# Altium PCB power_pcb.PcbDoc
Units mil, origin at the board's own origin, x right, y up, seen from the top; angles counter-clockwise.
Board outline 3025 x 1900 mil, 4 copper layers (Component Side, Ground Plane, Power Plane, Solder Side), stack 33.234 mil thick; 84 components, 43 nets, 285 pads, 61 vias.
Unrouted connection lines stored in the file: 14.
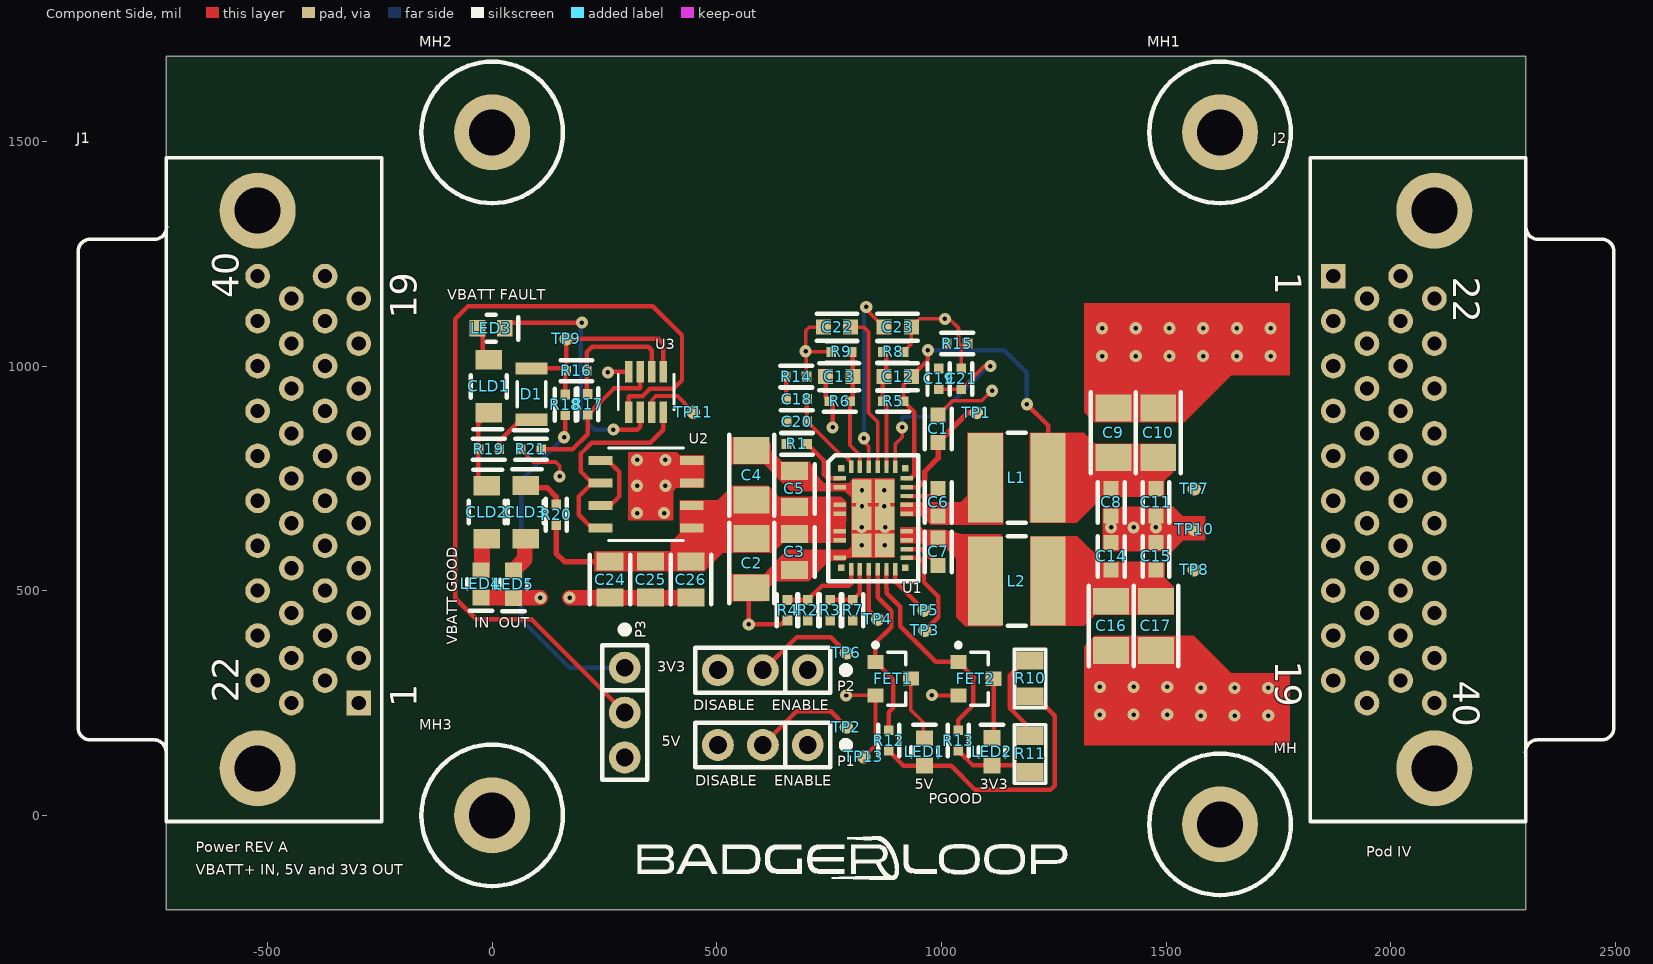
[diagram p0: Component Side view]
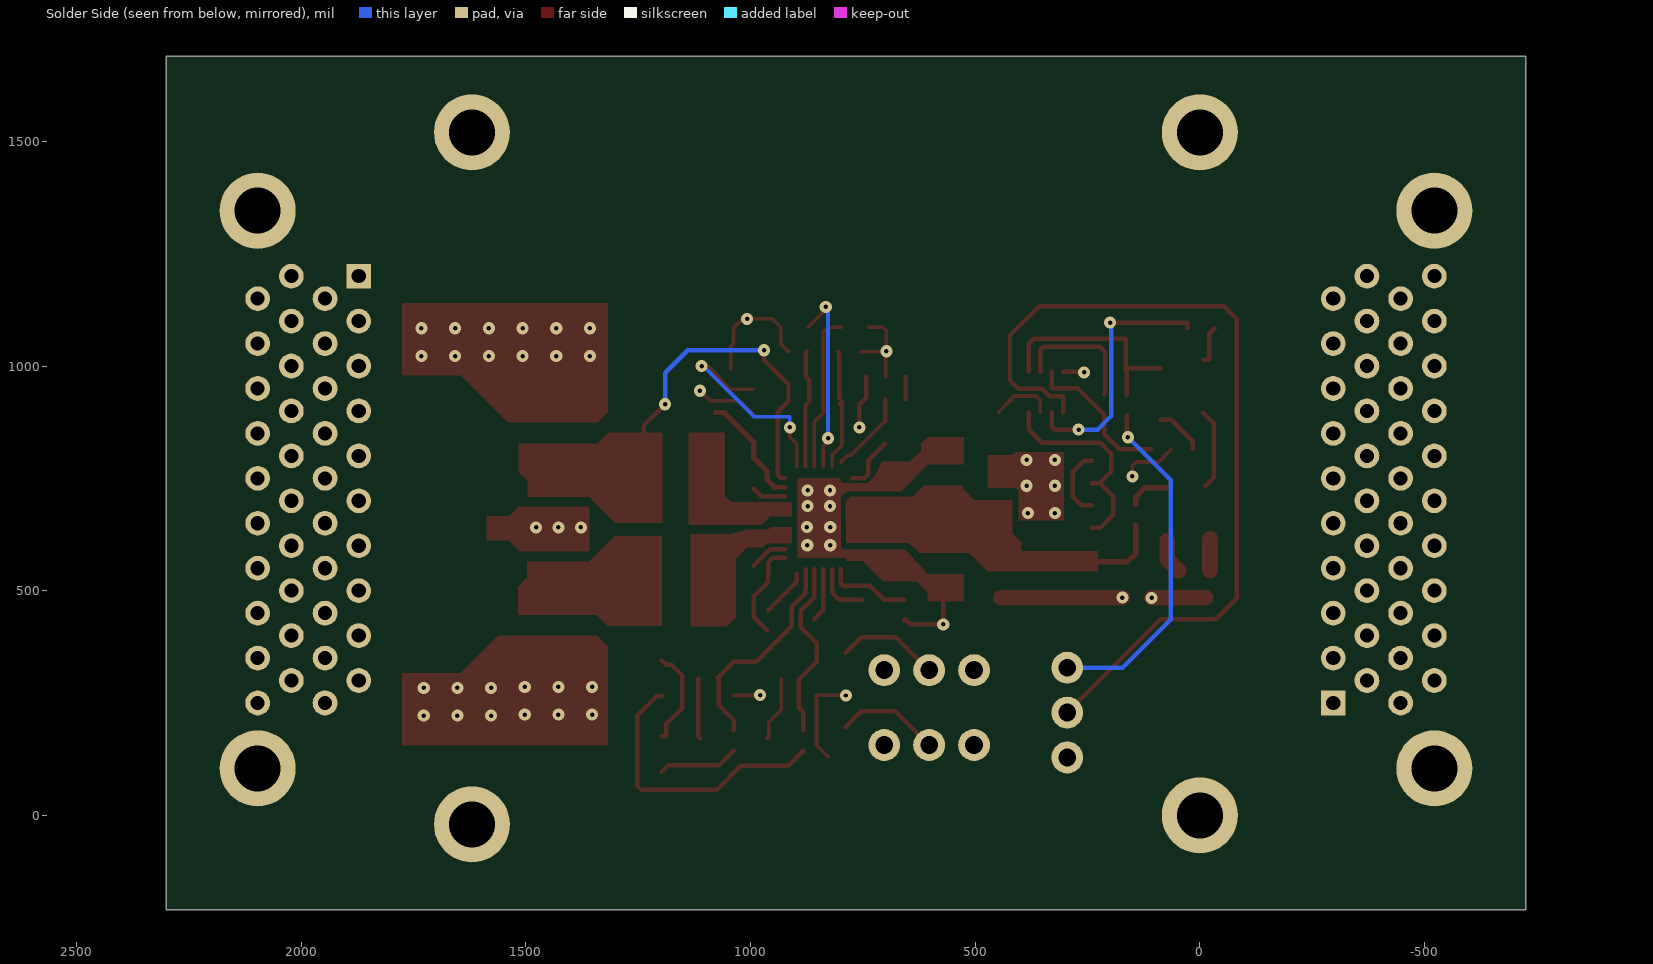
[diagram p1: Solder Side view, seen from below]
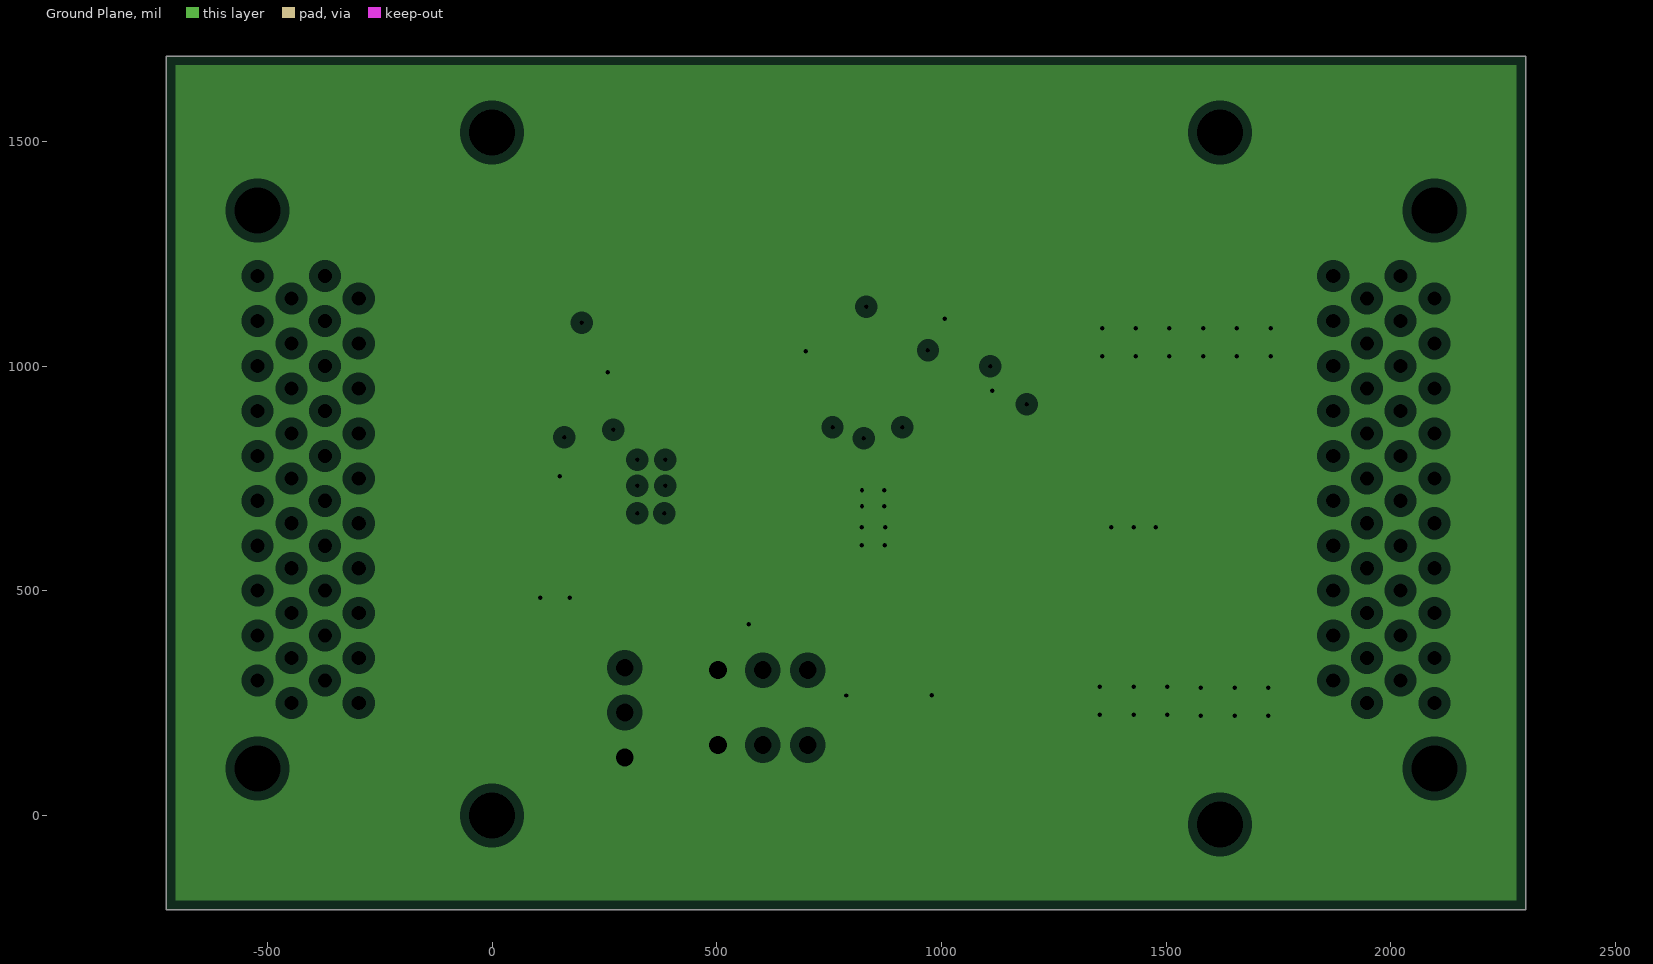
[diagram p2: Ground Plane, clearances drawn from the general rule]
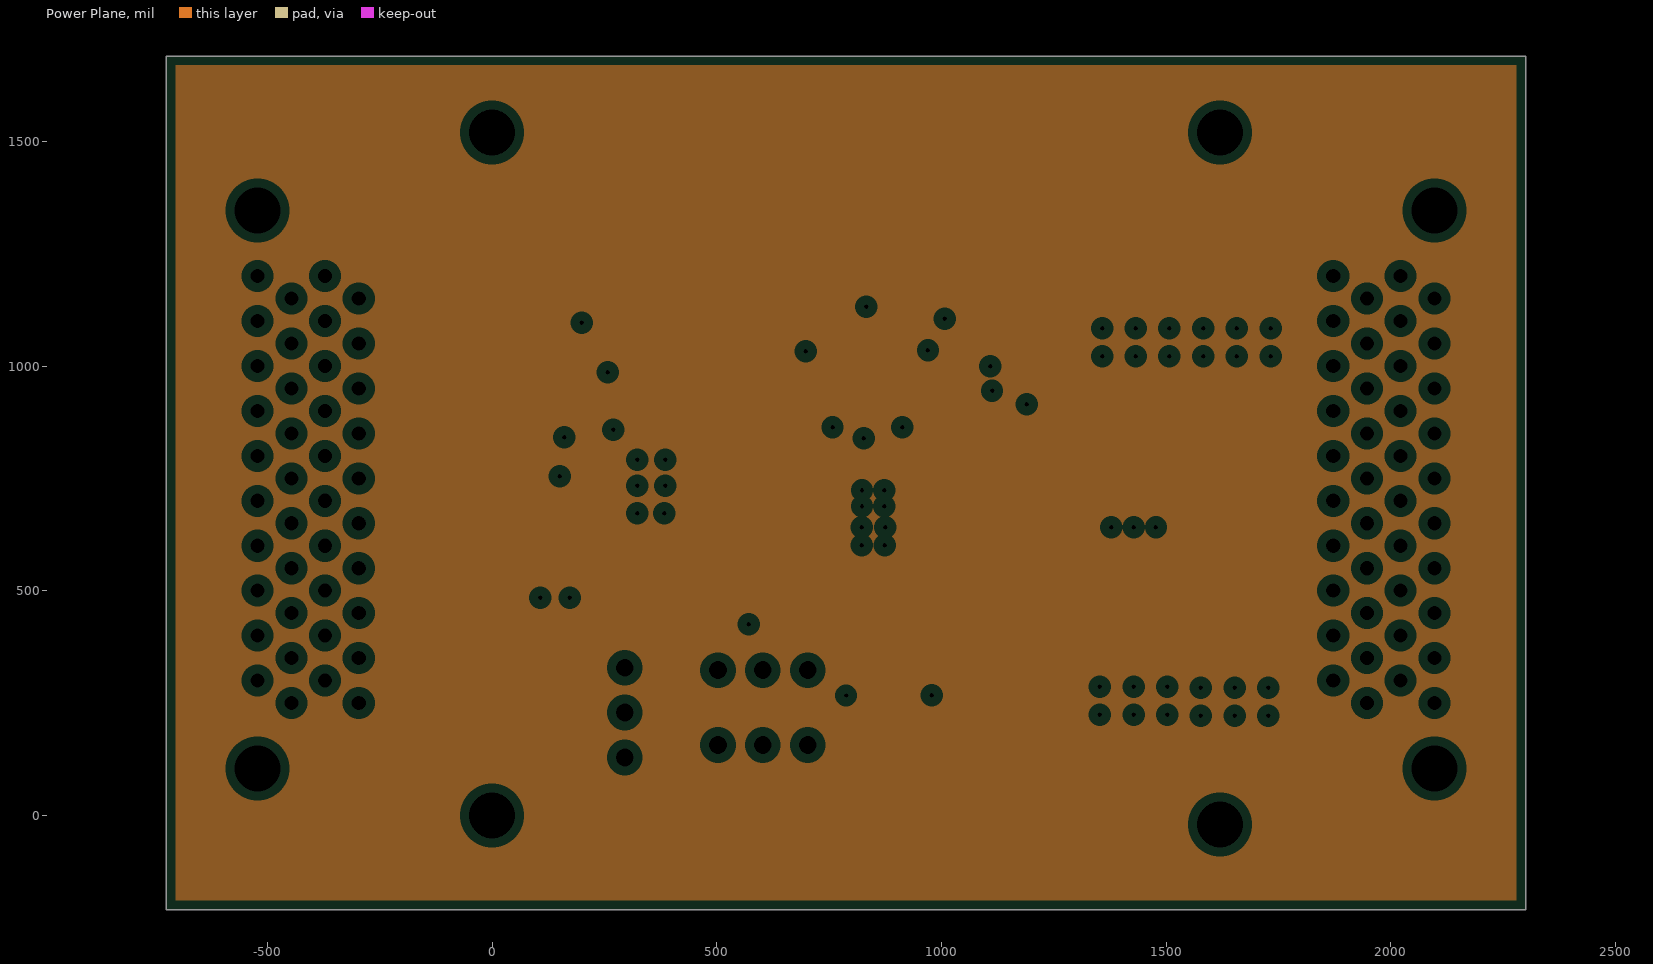
[diagram p3: Power Plane, clearances drawn from the general rule]
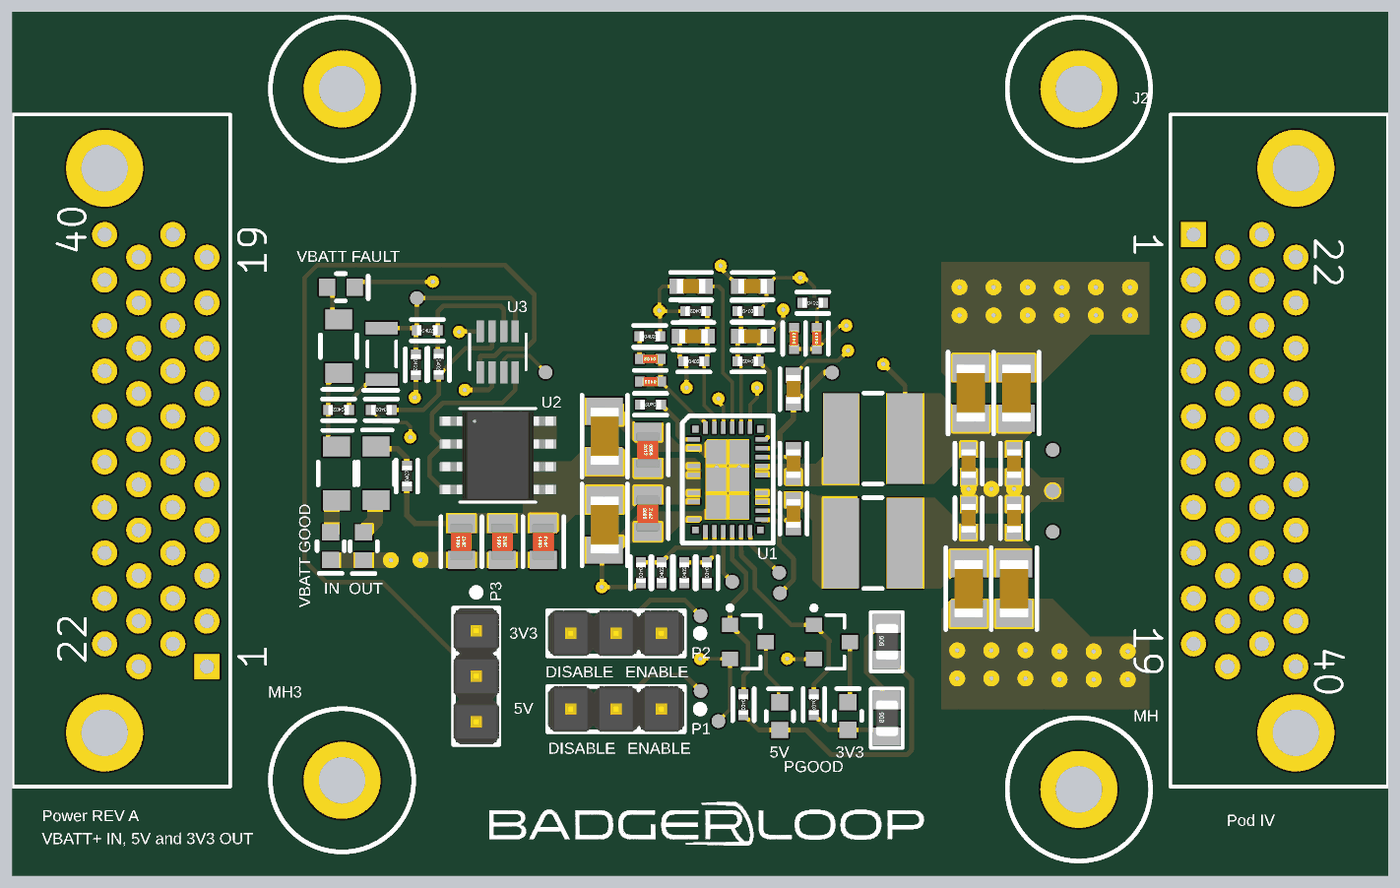
[diagram p4: 3D render of the assembled board from above, using the file's embedded part models]

## Layer stack, top to bottom
Top Solder: solder mask 0.4, Solder Resist, Dk 3.5
Component Side: signal copper 1.4
Dielectric 1: core 12.6, FR-4, Dk 4.8
Ground Plane: plane copper 1.417, net GND
Dielectric 3: prepreg 5, Dk 4.2
Power Plane: plane copper 1.417
Dielectric 4: core 10, Dk 4.2
Solder Side: signal copper 1.4
Bottom Solder: solder mask 0.4, Solder Resist, Dk 3.5

## Board outline
-725,-210 2300,-210 2300,1690 -725,1690

## Design rules (kind name [scope] priority, off if disabled: settings)
Clearance [All] p1: gap=7 ignorepadtopadclearanceinfootprint=TRUE except(0: Arc-Hole Track-Hole SMDPad-Hole THPad-Hole Via-Hole Fill-Hole Poly-Hole Region-Hole Text-Hole; 2: Text-Text)
PlaneClearance [All] p1: clearance=20
PlaneConnect [All] p1: planeconnectstyle=Relief reliefexpansion=20 reliefentries=4 reliefconductorwidth=10 reliefairgap=10
PolygonConnect [All] p1: connectstyle=Relief reliefconductorwidth=10 reliefentries=4 polygonreliefangle="90 Angle" airgapwidth=10
RoutingVias [All] p1: holewidth=28 width=50 viastyle="Through Hole" minholewidth=28 minwidth=50 maxholewidth=28 maxwidth=50
SolderMaskExpansion [All] p1: expansion=4
Width [All] p1: maxlimit=200 minlimit=7 preferedwidth=8 minimp=50.000000 maximp=50.000000 favimp=50.000000
28 further rules are at their usual default settings.

## Classes and differential pairs
component class power_main_connector: J1 J2 MH MH1 MH2 MH3
component class power_PROTECTION: C24 C25 C26 CLD1 CLD2 CLD3 D1 LED3 LED4 LED5 P3 R16 R17 R18 R19 R20 R21 TP9 TP10 TP11 TP13 U2 U3
component class power_PWR: C2 C3 C4 C5 C6 C7 C8 C9 C10 C11 C12 C13 C14 C15 C16 C17 C18 C19 C20 C21 C22 C23 FET1 FET2 L1 L2 LED1 LED2 R2 R3 R4 R5 R6 R7 R8 R9 R10 R11 R12 R13 R14 R15 TP7 TP8 U1
component class power_CTL: C1 Disable P1 P2 R1 TP1 TP2 TP3 TP4 TP5 TP6

## Components (designator, comment, footprint, x,y, rotation, side; value= is the part's Value field where it differs from the comment)
C1 "1µF" SMD-0603C 992.48,860 r180 top
C2 "10µF" SMD-1206C 577.48,561.47 r0 top
C3 "1µF" SMD-0805C 672.48,586.47 r0 top
C4 "10µF" SMD-1206C 577.48,756.59 r180 top
C5 "1µF" SMD-0805C 672.48,726.47 r180 top
C6 "0.22µF" SMD-0603C 992.48,696.47 r0 top
C7 "0.22µF" SMD-0603C 992.48,586.47 r180 top
C8 "4.7µF" SMD-0603C 1377.48,696.47 r0 top
C9 "47µF" SMD-1206C 1382.48,851.47 r180 top
C10 "47µF" SMD-1206C 1482.48,851.47 r180 top
C11 "1µF" SMD-0603C 1477.48,696.47 r0 top
C12 "4.7pF" SMD-0603C 902.48,976.47 r270 top
C13 "4.7pF" SMD-0603C 772.48,976.47 r90 top
C14 "1µF" SMD-0603C 1377.48,576.47 r180 top
C15 "4.7µF" SMD-0603C 1477.48,576.47 r180 top
C16 "47µF" SMD-1206C 1377.48,421.47 r0 top
C17 "47µF" SMD-1206C 1477.48,421.47 r0 top
C18 "0.047µF" SMD-0402C 677.48,926.47 r90 top
C19 "0.047µF" SMD-0402C 993.9,971.47 r0 top
C20 "0.047µF" SMD-0402C 678.3,876.47 r90 top
C21 "0.047µF" SMD-0402C 1043.9,971.47 r0 top
C22 "10000pF" SMD-0603C 767.48,1086.47 r270 top
C23 "10000pF" SMD-0603C 902.48,1086.47 r90 top
C24 "4.7µF" SMD-0805C 262.48,524.59 r0 top
C25 "22uF" SMD-0805C 352.48,524.59 r0 top
C26 "22uF" SMD-0805C 442.48,524.59 r0 top
CLD1 "CMJ2000" SODFL350X80-2N -7.52,954.59 r90 top
CLD2 "CMJ2000" SODFL350X80-2N -12.52,674.59 r270 top
CLD3 "CMJ2000" SODFL350X80-2N 75,675 r270 top
D1 "Diode General Purpose" "Diode General Purpose" 87.48,937.5 r270 top
FET1 "N-MOS" SOT95P240X110-3N 892.45,304.19 r0 top
FET2 "N-MOS" SOT95P240X110-3N 1076.85,304.07 r0 top
J1 "Connector 40" 050DSUB1.27-2H40 -725,725 r90 top
J2 "Connector 40" 050DSUB1.27-2H40 2300,725 r270 top
L1 "IND 1.0uH 5.48x5.28x3.1mm 5mOhm ESR" INDC5649X31N 1167.48,751.47 r0 top value=1.0uH
L2 "IND 1.0uH 5.48x5.28x3.1mm 5mOhm ESR" INDC5649X31N 1167.48,521.47 r180 top value=1.0uH
LED1 "GREEN 0603" "LED 0603 GREEN" 962.48,141.04 r90 top
LED2 "GREEN 0603" "LED 0603 GREEN" 1112.48,141.47 r90 top
LED3 "LED RED 0603" "LED 0603 RED" -2.52,1084.03 r0 top
LED4 "LED GREEN 0603" "LED 0603 GREEN" -25,515 r270 top
LED5 "LED GREEN 0603" "LED 0603 GREEN" 47.48,514.59 r270 top
MH "#10 Mount Hole" MH 1620,-20 r0 top
MH1 "#10 Mount Hole" MH 1620,1520 r0 top
MH2 "#10 Mount Hole" MH 0,1520 r0 top
MH3 "#10 Mount Hole" MH 0,0 r0 top
P1 "Header 3" "Pin Header 1x3 TH Pitch 2.54mm" 702.48,156.47 r180 top
P2 "Header 3" "Pin Header 1x3 TH Pitch 2.54mm" 702.48,323.22 r180 top
P3 "Header 3" "Pin Header 1x3 TH Pitch 2.54mm" 295,328.73 r270 top
R1 "15k" SMD-0402-RES 678.3,826.47 r90 top
R2 "1M" SMD-0402-RES 702.48,456.47 r0 top
R3 "1M" SMD-0402-RES 752.48,456.47 r0 top
R4 "1M" SMD-0402-RES 657.48,456.47 r180 top
R5 "1M" SMD-0402-RES 892.48,921.47 r90 top
R6 "1M" SMD-0402-RES 773.48,921.47 r270 top
R7 "1M" SMD-0402-RES 802.48,456.47 r180 top
R8 "191k" SMD-0402-RES 892.28,1031.47 r270 top
R9 "191k" SMD-0402-RES 777.48,1031.47 r90 top
R10 "25.5" SMD-0805-RES 1197.48,304.56 r0 top
R11 "25.5" SMD-0805-RES 1197.48,136.47 r0 top
R12 "100k" SMD-0402-RES 882.48,166.47 r180 top
R13 "100k" SMD-0402-RES 1037.48,166.47 r180 top
R14 "1M" SMD-0402-RES 676.48,976.47 r270 top
R15 "1M" SMD-0402-RES 1035,1050 r270 top
R16 "1M" SMD-0402-RES 187.48,989.47 r270 top
R17 "56k" SMD-0402-RES 212.48,914.59 r180 top
R18 "510k" SMD-0402-RES 162.48,913.53 r180 top
R19 "0.0" SMD-0402-RES -7.52,814.59 r90 top
R20 "0.0" SMD-0402-RES 142.48,668.97 r0 top
R21 "36k" SMD-0402-RES 86.3,814.59 r90 top
TP1 "TP" "Test Point" 1077.48,896.47 r90 top
TP2 "TP" "Test Point" 788.26,196.47 r90 top
TP3 "TP" "Test Point" 962.87,411.47 r90 top
TP4 "TP" "Test Point" 857.91,436.47 r90 top
TP5 "TP" "Test Point" 961.12,456.47 r90 top
TP6 "TP" "Test Point" 788.26,361.47 r90 top
TP7 "TP" "Test Point" 1562.48,726.47 r90 top
TP8 "TP" "Test Point" 1562.48,546.47 r90 top
TP9 "TP" "Test Point" 164.48,1060.22 r270 top
TP10 "TP" "Test Point" 1562.48,636.47 r0 top
TP11 "TP" "Test Point" 447.48,897.1 r270 top
TP13 "TP" "Test Point" 827.48,130 r270 top
U1 "LT8650SEV#PBF" QFN50P600X400X103-32N240X440 848.07,661.47 r0 top
U2 "SI4214DDY-T1-GE3" SOIC-8_SI-L 342.48,714.59 r0 top value=Value
U3 "LTC4365CTS8#TRMP" TSOT-23_TS8 342.48,942.1 r270 top value=Value

## Footprints (in the part's own frame and the unit in brackets; to place one, negate y for a bottom-side part, rotate by r counter-clockwise, add the part's x,y. Pads: shape width x height; smd on the part's side, far side on the other; paste and mask are expansions set on the pad)
050DSUB1.27-2H40 [mm] "Connector; D Subminiature; 40 Position; Right Angle; Pitch 1.27 mm"
  rect 1.4x1.4 hole 0.8: 1(-12.065,-10.87)
  round 1.4 hole 0.8: 2(-10.795,-8.965) 3(-9.525,-10.87) 4(-8.255,-8.965) 5(-6.985,-10.87) 6(-5.715,-8.965) 7(-4.445,-10.87) 8(-3.175,-8.965) 9(-1.905,-10.87) 10(-0.635,-8.965) 11(0.635,-10.87) 12(1.905,-8.965) 13(3.175,-10.87) 14(4.445,-8.965) 15(5.715,-10.87) 16(6.985,-8.965) 17(8.255,-10.87) 18(9.525,-8.965) 19(10.795,-10.87) 20(12.065,-8.965) 21(-12.065,-7.06) 22(-10.795,-5.155) 23(-9.525,-7.06) 24(-8.255,-5.155) 25(-6.985,-7.06) 26(-5.715,-5.155) 27(-4.445,-7.06) 28(-3.175,-5.155) 29(-1.905,-7.06) 30(-0.635,-5.155) 31(0.635,-7.06) 32(1.905,-5.155) 33(3.175,-7.06) 34(4.445,-5.155) 35(5.715,-7.06) 36(6.985,-5.155) 37(8.255,-7.06) 38(9.525,-5.155) 39(10.795,-7.06) 40(12.065,-5.155)
  round 4.3 hole 2.6: 41(-15.765,-5.155) 42(15.765,-5.155)
  silkscreen extent -18.76,-12.17 18.76,5
"Diode General Purpose" [mm] "Chip Diode, 2-Leads, Body 2.70x1.60mm, IPC Medium Density"
  rect 0.7x1.8 smd: 1(-1.45,0) 2(1.45,0)
  silkscreen extent -0.7,-1.02 2.03,0.89, body extent -1.42,-0.9 1.43,0.9, height 1.35
INDC5649X31N [mm] "Chip Inductor, 2-Leads, Body 5.60x4.90mm, IPC Medium Density"
  rect 1.98x5.04 smd: 1(-1.778,0) 2(1.778,0)
  silkscreen extent -0.51,-2.54 0.51,2.54, body extent -2.38,-2.45 2.54,2.45, height 3.1
"LED 0603 GREEN" [mm] "Chip Diode, 2-Leads, Body 1.60x0.80mm, IPC Medium Density"
  rect 0.9x0.95 smd: 1(-0.775,0) 2(0.775,0)
  silkscreen extent -0.25,-0.76 1.52,0.76, body extent -0.8,-0.4 0.8,0.4, height 0.8
"LED 0603 RED" [mm] "Chip Diode, 2-Leads, Body 1.60x0.80mm, IPC Medium Density"
  rect 0.9x0.95 smd: 1(-0.775,0) 2(0.775,0)
  silkscreen extent -0.25,-0.76 1.52,0.76, body extent -0.8,-0.4 0.8,0.4, height 0.8
MH [mm] "#10 Mount Hole"
  round 4.3 hole 2.6 unplated: 2(0,0)
  silkscreen extent -4,-4 4,4
"Pin Header 1x3 TH Pitch 2.54mm" [mm] "PinHeader 1x3 TH Pitch 2.54mm"
  round 1.8 hole 1: 1(0,0) 2(2.54,0) 3(5.08,0)
  silkscreen extent -2.3,-1.27 6.35,1.27, body extent -1.27,-1.27 6.35,1.27, height 9.5
QFN50P600X400X103-32N240X440 [mm]
  rect 0.7x0.25 smd: 1(-1.9,2.25) 2(-1.9,1.75) 4(-1.9,0.75) 5(-1.9,0.25) 7(-1.9,-0.75) 8(-1.9,-1.25) 10(-1.9,-2.25) 17(1.9,-2.25) 18(1.9,-1.75) 19(1.9,-1.25) 20(1.9,-0.75) 22(1.9,0.25) 23(1.9,0.75) 24(1.9,1.25) 25(1.9,1.75) 26(1.9,2.25)
  rect 0.25x0.7 smd: 11(-1.25,-2.9) 12(-0.75,-2.9) 13(-0.25,-2.9) 14(0.25,-2.9) 15(0.75,-2.9) 16(1.25,-2.9) 27(1.25,2.9) 28(0.75,2.9) 29(0.25,2.9) 30(-0.25,2.9) 31(-0.75,2.9) 32(-1.25,2.9)
  rect 1.1x1.33 smd: 33(-0.65,1.53) 34(0.65,1.53) 35(-0.65,0) 36(0.65,0) 37(-0.65,-1.53) 38(0.65,-1.53)
  rect 0.375x0.375 smd: P1(-1.813,2.812) P2(1.813,2.812) P3(-1.813,-2.812) P4(1.813,-2.812)
  silkscreen extent -2.54,-3.56 2.54,3.56, body extent -2,-3 2,3, height 0.94
SMD-0402-RES [mm]
  rect 0.55x0.55 smd: 1(0,0.584) 2(0,-0.584)
  silkscreen extent -0.6,-0.9 0.6,0.9, body extent -0.28,-0.57 0.27,0.58, height 0.41
SMD-0402C [mm]
  rect 0.55x0.55 smd: 1(0,0.584) 2(0,-0.584)
  silkscreen extent -0.64,-0.89 0.64,0.89, body extent -0.25,-0.51 0.25,0.51, height 0.51
SMD-0603C [mm]
  rect 0.85x0.85 smd: 1(0,0.775) 2(0,-0.775)
  silkscreen extent -0.76,-1.14 0.76,1.14, body extent -0.4,-0.8 0.4,0.8, height 0.9
SMD-0805-RES [mil]
  rect 60x40 smd: 1(0,40) 2(0,-40)
  silkscreen extent -35,-65 35,65, body extent -24,-39 26,39, height 31
SMD-0805C [mil]
  rect 60x40 smd: 1(0,40) 2(0,-40)
  silkscreen extent -45,-55 45,55, body extent -25,-39 25,39, height 35
SMD-1206C [mil]
  rect 80x60 smd: 1(0,55) 2(0,-55)
  silkscreen extent -50,-90 50,90, body extent -31,-63 32,63, height 39
SODFL350X80-2N [mm] "SODFL, 2-Leads, Body 1.60x3.50mm, IPC Medium Density"
  rect 1.1x1.5 smd: 1(-1.5,0) 2(1.5,0)
  silkscreen extent -2.41,-1.02 0.64,1.02, body extent -1.4,-0.85 1.4,0.85, height 0.8
SOIC-8_SI-L [mil]
  rect 53x20 smd paste+0 mask+0: 1(-101.5,75) 2(-101.5,25) 3(-101.5,-25) 4(-101.5,-75) 5(101.5,-75) 6(101.5,-25) 7(101.5,25) 8(101.5,75)
  silkscreen extent -84,-103 84,103, body extent -122,-98 122,98, height 69
SOT95P240X110-3N [mm] "SOT23, 3-Leads, Body 2.90x2.40mm, Pitch 0.95mm, IPC Medium Density"
  rect 0.9x0.8 smd: 1(-1,0.95) 2(1,0) 3(-1,-0.95)
  silkscreen extent -1.12,-1.5 0.7,2.02, body extent -0.7,-1.5 0.7,1.5, height 1.1
"Test Point" [mil] "SMD Test Point"
  round 30 smd: 1(0,0)
TSOT-23_TS8 [mil]
  rect 48x16 smd paste+0 mask+0: 1(-45,38.39) 2(-45,12.8) 3(-45,-12.8) 4(-45,-38.39) 5(45,-38.39) 6(45,-12.8) 7(45,12.8) 8(45,38.39)
  silkscreen extent -40,-62 40,62, body extent -50,-60 45,57, height 24

## Part data
C1 C11 C14: library part GRM188R61H105KAALD, "CAP CER 1UF 50V X5R 0603", Digi-Key Part Number=490-10732-1-ND, Manufacturer="Murata Electronics North America", Operating Temperature="-55°C ~ 85°C", Package / Case="0603 (1608 Metric)", Ratings=-, Temperature Coefficient=X5R, Tolerance=±10%, Voltage=50V, @ qty=0, Applications="General Purpose", Datasheets=http://www.murata.com/~/media/webrenewal/support/library/catalog/products/capacitor/mlcc/c02e.pdf, Factory Stock=0, Features=-, Height - Seated (Max)=-, Image=//media.digikey.com/Renders/Murata%20Renders/ZRB-SERIES-0402.jpg, Lead Spacing=-, Lead Style=-, Minimum Quantity=1, Mounting Type="Surface Mount, MLCC", Packaging="Cut Tape (CT)", Part Number=GRM188R61H105KAALD, Part Status=Active, Quantity Available=46576, Series=GRM, Size / Dimension="0.063\" L x 0.031\" W (1.60mm x 0.80mm)", Thickness (Max)="0.035\" (0.90mm)", Unit Price (USD)=0.17
C2 C4: library part GRM31CR61H106KA12L, "CAP CER 10UF 50V X5R 1206", Digi-Key Part Number=490-5961-1-ND, Manufacturer="Murata Electronics North America", Operating Temperature="-55°C ~ 85°C", Package / Case="1206 (3216 Metric)", Ratings=-, Temperature Coefficient=X5R, Tolerance=±10%, Voltage=50V, @ qty=0, Applications="General Purpose", Datasheets=http://www.murata.com/~/media/webrenewal/support/library/catalog/products/capacitor/mlcc/c02e.pdf, Factory Stock=0, Features=-, Height - Seated (Max)=-, Image=//media.digikey.com/Renders/Murata%20Renders/GR331BD72E473KW01L.jpg, Lead Spacing=-, Lead Style=-, Minimum Quantity=1, Mounting Type="Surface Mount, MLCC", Packaging="Cut Tape (CT)", Part Number=GRM31CR61H106KA12L, Part Status=Active, Quantity Available=86736, Series=GRM, Size / Dimension="0.126\" L x 0.063\" W (3.20mm x 1.60mm)", Thickness (Max)="0.071\" (1.80mm)", Unit Price (USD)=0.65
C3 C5: library part GCJ21BR71H105KA01L, "CAP CER 1UF 50V X7R 0805", Digi-Key Part Number=490-10667-1-ND, Manufacturer="Murata Electronics North America", Operating Temperature="-55°C ~ 125°C", Package / Case="0805 (2012 Metric)", Ratings=AEC-Q200, Temperature Coefficient=X7R, Tolerance=±10%, Voltage=50V, @ qty=0, Applications="Automotive, Boardflex Sensitive", Datasheets=http://www.murata.com/~/media/webrenewal/support/library/catalog/products/capacitor/mlcc/c03e.ashx, Factory Stock=0, Features="Soft Termination", Height - Seated (Max)=-, Image=//media.digikey.com/Renders/Murata%20Renders/0805%20(2012%20Metric)%20.85mm.jpg, Lead Spacing=-, Lead Style=-, Minimum Quantity=1, Mounting Type="Surface Mount, MLCC", Packaging="Cut Tape (CT)", Part Number=GCJ21BR71H105KA01L, Part Status=Active, Quantity Available=55137, Series=GCJ, Size / Dimension="0.079\" L x 0.049\" W (2.00mm x 1.25mm)", Thickness (Max)="0.057\" (1.45mm)", Unit Price (USD)=0.33
C6 C7: library part GCJ188R71E224KA12D, "CAP CER 0.22UF 25V X7R 0603", Digi-Key Part Number=490-5797-1-ND, Manufacturer="Murata Electronics North America", Operating Temperature="-55°C ~ 125°C", Package / Case="0603 (1608 Metric)", Ratings=AEC-Q200, Temperature Coefficient=X7R, Tolerance=±10%, Voltage=25V, @ qty=0, Applications="Automotive, Boardflex Sensitive", Datasheets=http://www.murata.com/~/media/webrenewal/support/library/catalog/products/capacitor/mlcc/c03e.ashx, Factory Stock=0, Features="Soft Termination", Height - Seated (Max)=-, Image=//media.digikey.com/Renders/Murata%20Renders/0603%28LQG18%29.jpg, Lead Spacing=-, Lead Style=-, Minimum Quantity=1, Mounting Type="Surface Mount, MLCC", Packaging="Cut Tape (CT)", Part Number=GCJ188R71E224KA12D, Part Status=Active, Quantity Available=23903, Series=GCJ, Size / Dimension="0.063\" L x 0.031\" W (1.60mm x 0.80mm)", Thickness (Max)="0.035\" (0.90mm)", Unit Price (USD)=0.24
C8 C15: library part GRM188R61E475KE11D, "CAP CER 4.7UF 25V X5R 0603", Digi-Key Part Number=490-7203-1-ND, Manufacturer="Murata Electronics North America", Operating Temperature="-55°C ~ 85°C", Package / Case="0603 (1608 Metric)", Ratings=-, Temperature Coefficient=X5R, Tolerance=±10%, Voltage=25V, @ qty=0, Applications="General Purpose", Datasheets=http://www.murata.com/~/media/webrenewal/support/library/catalog/products/capacitor/mlcc/c02e.pdf, Factory Stock=0, Features=-, Height - Seated (Max)=-, Image=//media.digikey.com/Renders/Murata%20Renders/ZRB-SERIES-0402.jpg, Lead Spacing=-, Lead Style=-, Minimum Quantity=1, Mounting Type="Surface Mount, MLCC", Packaging="Cut Tape (CT)", Part Number=GRM188R61E475KE11D, Part Status=Active, Quantity Available=150881, Series=GRM, Size / Dimension="0.063\" L x 0.031\" W (1.60mm x 0.80mm)", Thickness (Max)="0.031\" (0.80mm)", Unit Price (USD)=0.32
C9 C10 C16 C17: library part GRM31CR61A476ME15L, "CAP CER 47UF 10V X5R 1206", Digi-Key Part Number=490-5528-1-ND, Manufacturer="Murata Electronics North America", Operating Temperature="-55°C ~ 85°C", Package / Case="1206 (3216 Metric)", Ratings=-, Temperature Coefficient=X5R, Tolerance=±20%, Voltage=10V, @ qty=0, Applications="General Purpose", Datasheets=http://www.murata.com/~/media/webrenewal/support/library/catalog/products/capacitor/mlcc/c02e.pdf, Factory Stock=0, Features=-, Height - Seated (Max)=-, Image=//media.digikey.com/Renders/Murata%20Renders/GR331BD72E473KW01L.jpg, Lead Spacing=-, Lead Style=-, Minimum Quantity=1, Mounting Type="Surface Mount, MLCC", Packaging="Cut Tape (CT)", Part Number=GRM31CR61A476ME15L, Part Status=Active, Quantity Available=151940, Series=GRM, Size / Dimension="0.126\" L x 0.063\" W (3.20mm x 1.60mm)", Thickness (Max)="0.071\" (1.80mm)", Unit Price (USD)=0.64
C12 C13: library part GRM1885C1H4R7CA01D, "CAP CER 4.7PF 50V NP0 0603", Digi-Key Part Number=490-12722-1-ND, Manufacturer="Murata Electronics North America", Operating Temperature="-55°C ~ 125°C", Package / Case="0603 (1608 Metric)", Ratings=-, Temperature Coefficient="C0G, NP0", Tolerance=±0.25pF, Voltage=50V, @ qty=0, Applications="General Purpose", Datasheets=http://www.murata.com/~/media/webrenewal/support/library/catalog/products/capacitor/mlcc/c02e.pdf, Factory Stock=0, Features=-, Height - Seated (Max)=-, Image=//media.digikey.com/Renders/Murata%20Renders/ZRB-SERIES-0402.jpg, Lead Spacing=-, Lead Style=-, Minimum Quantity=1, Mounting Type="Surface Mount, MLCC", Packaging="Cut Tape (CT)", Part Number=GRM1885C1H4R7CA01D, Part Status=Active, Quantity Available=25832, Series=GRM, Size / Dimension="0.063\" L x 0.031\" W (1.60mm x 0.80mm)", Thickness (Max)="0.035\" (0.90mm)", Unit Price (USD)=0.1
C18 C19 C20 C21: library part GCM155R71C473KA37D, "CAP CER 0.047UF 16V X7R 0402", Digi-Key Part Number=490-6042-1-ND, Manufacturer="Murata Electronics North America", Operating Temperature="-55°C ~ 125°C", Package / Case="0402 (1005 Metric)", Ratings=AEC-Q200, Temperature Coefficient=X7R, Tolerance=±10%, Voltage=16V, @ qty=0, Applications=Automotive, Datasheets=http://www.murata.com/~/media/webrenewal/support/library/catalog/products/capacitor/mlcc/c03e.ashx, Do Not Populate=DNP, Factory Stock=0, Features=-, Height - Seated (Max)=-, Image=//media.digikey.com/Renders/Murata%20Renders/ZRB-SERIES-0402.jpg, Lead Spacing=-, Lead Style=-, Minimum Quantity=1, Mounting Type="Surface Mount, MLCC", Packaging="Cut Tape (CT)", Part Number=GCM155R71C473KA37D, Part Status=Active, Quantity Available=86052, Series=GCM, Size / Dimension="0.039\" L x 0.020\" W (1.00mm x 0.50mm)", Thickness (Max)="0.022\" (0.55mm)", Unit Price (USD)=0.1
C22 C23: library part GRM188R71E103KA01D, "CAP CER 10000PF 25V X7R 0603", Digi-Key Part Number=490-1520-1-ND, Manufacturer="Murata Electronics North America", Operating Temperature="-55°C ~ 125°C", Package / Case="0603 (1608 Metric)", Ratings=-, Temperature Coefficient=X7R, Tolerance=±10%, Voltage=25V, @ qty=0, Applications="General Purpose", Datasheets=http://www.murata.com/~/media/webrenewal/support/library/catalog/products/capacitor/mlcc/c02e.pdf, Factory Stock=0, Features=-, Height - Seated (Max)=-, Image=//media.digikey.com/Renders/Murata%20Renders/ZRB-SERIES-0402.jpg, Lead Spacing=-, Lead Style=-, Minimum Quantity=1, Mounting Type="Surface Mount, MLCC", Packaging="Cut Tape (CT)", Part Number=GRM188R71E103KA01D, Part Status=Active, Quantity Available=886950, Series=GRM, Size / Dimension="0.063\" L x 0.031\" W (1.60mm x 0.80mm)", Thickness (Max)="0.035\" (0.90mm)", Unit Price (USD)=0.1
C24: library part GRM21BR61H475KE51L, "CAP CER 4.7UF 50V X5R 0805", Digi-Key Part Number=490-10751-1-ND, Manufacturer="Murata Electronics North America", Operating Temperature="-55°C ~ 85°C", Package / Case="0805 (2012 Metric)", Ratings=-, Temperature Coefficient=X5R, Tolerance=±10%, Voltage=50V, @ qty=0, Applications="General Purpose", Datasheets=http://www.murata.com/~/media/webrenewal/support/library/catalog/products/capacitor/mlcc/c02e.pdf, Factory Stock=0, Features=-, Height - Seated (Max)=-, Image=//media.digikey.com/Renders/Murata%20Renders/0805%20(2012%20Metric)%20.85mm.jpg, Lead Spacing=-, Lead Style=-, Minimum Quantity=1, Mounting Type="Surface Mount, MLCC", Packaging="Cut Tape (CT)", Part Number=GRM21BR61H475KE51L, Part Status=Active, Quantity Available=29522, Series=GRM, Size / Dimension="0.079\" L x 0.049\" W (2.00mm x 1.25mm)", Thickness (Max)="0.055\" (1.40mm)", Unit Price (USD)=0.37
C25 C26: library part GC321AD72E103KX01D, "CAP CER 10000PF 250V X7T 0805", Digi-Key Part Number=445-11527-1-ND, Manufacturer="TDK Corporation", Operating Temperature="-55°C ~ 125°C", Package / Case=0805, Part Number=C2012JB1V226M125AC, Ratings=AEC-Q200, Temperature Coefficient=JB, Tolerance=±20%, Voltage=35V, @ qty=0, Applications=Automotive, Factory Stock=10000, Features=-, Height - Seated (Max)=-, Image=//media.digikey.com/Renders/Murata%20Renders/0805(GC3)200x125.jpg, Lead Spacing=-, Lead Style=-, Minimum Quantity=1, Mounting Type="Surface Mount, MLCC", Packaging="Cut Tape (CT)", Part Status=Active, Quantity Available=4000, Series=GC3, Size / Dimension="0.079\" L x 0.049\" W (2.00mm x 1.25mm)", Thickness (Max)="0.039\" (1.00mm)", Unit Price (USD)=0.3
CLD1 CLD2 CLD3: library part "DIODE Current Limiting Single SM", "DIODE CURRENT LIMITING SINGLE SM", Current Output=2mA, Manufacturer="Central Semiconductor Corp", Manufacturer P/N="CMJ2000 TR", Package / Case=SOD-123F, ComponentLink1Description=Digikey, ComponentLink1URL=https://www.digikey.com/product-detail/en/central-semiconductor-corp/CMJ2000-TR/CMJ2000CT-ND/5018676, Digikey P/N=CMJ2000CT-ND, Vin Max=100V
D1: "DIODE GEN PURP 100V 150MA SOD123", Manufacturer="Micro Commercial Co", Manufacturer P/N=1N4148W-TP, Package / Case=SOD123, ComponentLink1Description=Digikey, ComponentLink1URL=https://www.digikey.com/product-detail/en/micro-commercial-co/1N4148W-TP/1N4148WTPMSTR-ND/717196, Digikey P/N=1N4148WTPMSTR-ND
FET1 FET2: library part "N-MOS Enhancement Mode", "MOSFET N-CH 60V 200MA SOT23-3", Manufacturer=Zetex, Manufacturer P/N=ZVN4106FTA, Digikey P/N=ZVN4106FCT-ND
J1 J2: "Plug Assembly, 40-Pin Connector", PackageDocument=E, DatasheetDocument=31-Oct-1991, Gender="Receptacle Header", LatestRevisionDate=17-Jul-2002, LatestRevisionNote="Re-released for DXP Platform.", Orientation="Right Angle", PackageReference=174213-2, Positions=40, Published=15-Jun-2001, Publisher="Altium Limited"
L1 L2: "XFL5030-102ME", Inductance=1uH, Maximum DC Current=28A, Package / Case="5.48mm x 5.28mm x 3.1mm", Temperature="-40C ~ 125C", Tolerance=+-20%, Datasheet=https://www.mouser.com/datasheet/2/597/xfl5030-1223909.pdf, Height=3.1mm, Link=https://www.mouser.com/ProductDetail/Coilcraft/XFL5030-102MEB?qs=sGAEpiMZZMsg%252by3WlYCkUy0Se8nYOmwuY%252bO5URw9yeY%3d, Manufacturer_Part_Number=XFL5030-102ME, Qualification=AEC-Q200, RefDes=RefDes, Type=DEV, Vendor=CoilCraft
LED1 LED2: library part "LED GREEN 0603", Color=GREEN, Manufacturer="Lite-On Inc.", Manufacturer P/N=LTST-C190KGKT, Package / Case=0603, Digikey P/N=160-1435-1-ND
LED3: "Red 631nm LED Indication - Discrete 2V 0603 (1608 Metric)", Color=RED, Manufacturer="Lite-On Inc.", Manufacturer P/N=LTST-C190KRKT, Package / Case=0603, Digikey P/N=160-1436-1-ND
LED4 LED5: Color=GREEN, Manufacturer="Lite-On Inc.", Manufacturer P/N=LTST-C190KGKT, Package / Case=0603, Digikey P/N=160-1435-1-ND
P1 P2 P3: "Header, 3-Pin", LatestRevisionDate=17-Jul-2002, LatestRevisionNote="Re-released for DXP Platform.", Publisher="Altium Limited"
R1: library part ERJ-2GEJ153X, "RES SMD 15K OHM 5% 1/10W 0402", Digi-Key Part Number=P15KJCT-ND, Manufacturer="Panasonic Electronic Components", Operating Temperature="-55°C ~ 155°C", Package / Case="0402 (1005 Metric)", Power (Watts)="0.1W, 1/10W", Supplier Device Package=0402, Temperature Coefficient=±200ppm/°C, Tolerance=±5%, @ qty=1500, Composition="Thick Film", Datasheets=http://industrial.panasonic.com/www-cgi/jvcr13pz.cgi?E+PZ+3+AOA0001+ERJ2GEJ153X+7+WW, Factory Stock=0, Failure Rate=-, Features="Automotive AEC-Q200", Height - Seated (Max)="0.016\" (0.40mm)", Image=//media.digikey.com/Photos/Panasonic%20Photos/ERJ-PA2-Series.jpg, Minimum Quantity=1, Number of Terminations=2, Packaging="Cut Tape (CT)", Part Number=ERJ-2GEJ153X, Part Status=Active, Quantity Available=331812, Series=ERJ, Size / Dimension="0.039\" L x 0.020\" W (1.00mm x 0.50mm)", Unit Price (USD)=0.00350
R2 R3 R4 R5 R6 R7 R14 R15: library part ERJ-2RKF1004X, "RES SMD 1M OHM 1% 1/10W 0402", Digi-Key Part Number=P1.00MLCT-ND, Manufacturer="Panasonic Electronic Components", Operating Temperature="-55°C ~ 155°C", Package / Case="0402 (1005 Metric)", Power (Watts)="0.1W, 1/10W", Supplier Device Package=0402, Temperature Coefficient=±100ppm/°C, Tolerance=±1%, @ qty=1500, Composition="Thick Film", Datasheets=http://industrial.panasonic.com/www-cgi/jvcr13pz.cgi?E+PZ+3+AOA0002+ERJ2RKF1004X+7+WW, Factory Stock=0, Failure Rate=-, Features="Automotive AEC-Q200", Height - Seated (Max)="0.016\" (0.40mm)", Image=//media.digikey.com/Photos/Panasonic%20Photos/ERJ-PA2-Series.jpg, Minimum Quantity=1, Number of Terminations=2, Packaging="Cut Tape (CT)", Part Number=ERJ-2RKF1004X, Part Status=Active, Quantity Available=773705, Series=ERJ, Size / Dimension="0.039\" L x 0.020\" W (1.00mm x 0.50mm)", Unit Price (USD)=0.00496
  R4 R7 R14 R15: Do Not Populate=DNP
R8 R9: library part ERJ-2RKF1913X, "RES SMD 191K OHM 1% 1/10W 0402", Digi-Key Part Number=P191KLCT-ND, Manufacturer="Panasonic Electronic Components", Operating Temperature="-55°C ~ 155°C", Package / Case="0402 (1005 Metric)", Power (Watts)="0.1W, 1/10W", Supplier Device Package=0402, Temperature Coefficient=±100ppm/°C, Tolerance=±1%, @ qty=1500, Composition="Thick Film", Datasheets=http://industrial.panasonic.com/www-cgi/jvcr13pz.cgi?E+PZ+3+AOA0002+ERJ2RKF1913X+7+WW, Factory Stock=0, Failure Rate=-, Features="Automotive AEC-Q200", Height - Seated (Max)="0.016\" (0.40mm)", Image=//media.digikey.com/Photos/Panasonic%20Photos/ERJ-PA2-Series.jpg, Minimum Quantity=1, Number of Terminations=2, Packaging="Cut Tape (CT)", Part Number=ERJ-2RKF1913X, Part Status=Active, Quantity Available=44522, Series=ERJ, Size / Dimension="0.039\" L x 0.020\" W (1.00mm x 0.50mm)", Unit Price (USD)=0.00496
R10 R11: library part ERJ-6ENF25R5V, "RES SMD 25.5 OHM 1% 1/8W 0805", Digi-Key Part Number=P25.5CCT-ND, Manufacturer="Panasonic Electronic Components", Operating Temperature="-55°C ~ 155°C", Package / Case="0805 (2012 Metric)", Power (Watts)="0.125W, 1/8W", Supplier Device Package=0805, Temperature Coefficient=±100ppm/°C, Tolerance=±1%, @ qty=1500, Composition="Thick Film", Datasheets=http://industrial.panasonic.com/www-cgi/jvcr13pz.cgi?E+PZ+3+AOA0002+ERJ6ENF25R5V+7+WW, Factory Stock=0, Failure Rate=-, Features="Automotive AEC-Q200", Height - Seated (Max)="0.028\" (0.70mm)", Image=//media.digikey.com/Renders/Panasonic%20Renders/ERJ-0805%20Pkg.jpg, Minimum Quantity=1, Number of Terminations=2, Packaging="Cut Tape (CT)", Part Number=ERJ-6ENF25R5V, Part Status=Active, Quantity Available=41783, Series=ERJ, Size / Dimension="0.079\" L x 0.049\" W (2.00mm x 1.25mm)", Unit Price (USD)=0.00729
R12 R13: library part ERJ-2GEJ104X, "RES SMD 100K OHM 5% 1/10W 0402", Digi-Key Part Number=P100KJCT-ND, Manufacturer="Panasonic Electronic Components", Operating Temperature="-55°C ~ 155°C", Package / Case="0402 (1005 Metric)", Power (Watts)="0.1W, 1/10W", Supplier Device Package=0402, Temperature Coefficient=±200ppm/°C, Tolerance=±5%, @ qty=1500, Composition="Thick Film", Datasheets=http://industrial.panasonic.com/www-cgi/jvcr13pz.cgi?E+PZ+3+AOA0001+ERJ2GEJ104X+7+WW, Factory Stock=0, Failure Rate=-, Features="Automotive AEC-Q200", Height - Seated (Max)="0.016\" (0.40mm)", Image=//media.digikey.com/Photos/Panasonic%20Photos/ERJ-PA2-Series.jpg, Minimum Quantity=1, Number of Terminations=2, Packaging="Cut Tape (CT)", Part Number=ERJ-2GEJ104X, Part Status=Active, Quantity Available=2387986, Series=ERJ, Size / Dimension="0.039\" L x 0.020\" W (1.00mm x 0.50mm)", Unit Price (USD)=0.00350
R16: library part ERJ-2GEJ105X, "RES SMD 1M OHM 5% 1/10W 0402", Digi-Key Part Number=P1.0MJCT-ND, Manufacturer="Panasonic Electronic Components", Operating Temperature="-55°C ~ 155°C", Package / Case="0402 (1005 Metric)", Power (Watts)="0.1W, 1/10W", Supplier Device Package=0402, Temperature Coefficient=±200ppm/°C, Tolerance=±5%, @ qty=1500, Composition="Thick Film", Datasheets=http://industrial.panasonic.com/www-cgi/jvcr13pz.cgi?E+PZ+3+AOA0001+ERJ2GEJ105X+7+WW, Factory Stock=0, Failure Rate=-, Features="Automotive AEC-Q200", Height - Seated (Max)="0.016\" (0.40mm)", Image=//media.digikey.com/Photos/Panasonic%20Photos/ERJ-PA2-Series.jpg, Minimum Quantity=1, Number of Terminations=2, Packaging="Cut Tape (CT)", Part Number=ERJ-2GEJ105X, Part Status=Active, Quantity Available=1082572, Series=ERJ, Size / Dimension="0.039\" L x 0.020\" W (1.00mm x 0.50mm)", Unit Price (USD)=0.00350
R17: library part ERJ-2GEJ563X, "RES SMD 56K OHM 5% 1/10W 0402", Digi-Key Part Number=P56KJCT-ND, Manufacturer="Panasonic Electronic Components", Operating Temperature="-55°C ~ 155°C", Package / Case="0402 (1005 Metric)", Power (Watts)="0.1W, 1/10W", Supplier Device Package=0402, Temperature Coefficient=±200ppm/°C, Tolerance=±5%, @ qty=1500, Composition="Thick Film", Datasheets=http://industrial.panasonic.com/www-cgi/jvcr13pz.cgi?E+PZ+3+AOA0001+ERJ2GEJ563X+7+WW, Factory Stock=0, Failure Rate=-, Features="Automotive AEC-Q200", Height - Seated (Max)="0.016\" (0.40mm)", Image=//media.digikey.com/Photos/Panasonic%20Photos/ERJ-PA2-Series.jpg, Minimum Quantity=1, Number of Terminations=2, Packaging="Cut Tape (CT)", Part Number=ERJ-2GEJ563X, Part Status=Active, Quantity Available=208344, Series=ERJ, Size / Dimension="0.039\" L x 0.020\" W (1.00mm x 0.50mm)", Unit Price (USD)=0.00350
R18: library part ERJ-2GEJ514X, "RES SMD 510K OHM 5% 1/10W 0402", Digi-Key Part Number=P510KJCT-ND, Manufacturer="Panasonic Electronic Components", Operating Temperature="-55°C ~ 155°C", Package / Case="0402 (1005 Metric)", Power (Watts)="0.1W, 1/10W", Supplier Device Package=0402, Temperature Coefficient=±200ppm/°C, Tolerance=±5%, @ qty=1500, Composition="Thick Film", Datasheets=http://industrial.panasonic.com/www-cgi/jvcr13pz.cgi?E+PZ+3+AOA0001+ERJ2GEJ514X+7+WW, Factory Stock=0, Failure Rate=-, Features="Automotive AEC-Q200", Height - Seated (Max)="0.016\" (0.40mm)", Image=//media.digikey.com/Photos/Panasonic%20Photos/ERJ-PA2-Series.jpg, Minimum Quantity=1, Number of Terminations=2, Packaging="Cut Tape (CT)", Part Number=ERJ-2GEJ514X, Part Status=Active, Quantity Available=151230, Series=ERJ, Size / Dimension="0.039\" L x 0.020\" W (1.00mm x 0.50mm)", Unit Price (USD)=0.00350
R19 R20: library part ERJ-2GE0R00X, "RES SMD 0.0OHM JUMPER 1/10W 0402", Digi-Key Part Number=P0.0JCT-ND, Manufacturer="Panasonic Electronic Components", Operating Temperature="-55°C ~ 155°C", Package / Case="0402 (1005 Metric)", Power (Watts)="0.1W, 1/10W", Supplier Device Package=0402, Temperature Coefficient=-, Tolerance=Jumper, @ qty=1500, Composition="Thick Film", Datasheets=http://industrial.panasonic.com/www-cgi/jvcr13pz.cgi?E+PZ+3+AOA0001+ERJ2GE0R00X+7+WW, Factory Stock=0, Failure Rate=-, Features="Automotive AEC-Q200", Height - Seated (Max)="0.016\" (0.40mm)", Image=//media.digikey.com/Photos/Panasonic%20Photos/ERJ-PA2-Series.jpg, Minimum Quantity=1, Number of Terminations=2, Packaging="Cut Tape (CT)", Part Number=ERJ-2GE0R00X, Part Status=Active, Quantity Available=3152483, Series=ERJ, Size / Dimension="0.039\" L x 0.020\" W (1.00mm x 0.50mm)", Unit Price (USD)=0.00384
R21: library part ERJ-2RKF3602X, "RES SMD 36K OHM 1% 1/10W 0402", Digi-Key Part Number=P36.0KLCT-ND, Manufacturer="Panasonic Electronic Components", Operating Temperature="-55°C ~ 155°C", Package / Case="0402 (1005 Metric)", Power (Watts)="0.1W, 1/10W", Supplier Device Package=0402, Temperature Coefficient=±100ppm/°C, Tolerance=±1%, @ qty=1500, Composition="Thick Film", Datasheets=http://industrial.panasonic.com/www-cgi/jvcr13pz.cgi?E+PZ+3+AOA0002+ERJ2RKF3602X+7+WW, Factory Stock=0, Failure Rate=-, Features="Automotive AEC-Q200", Height - Seated (Max)="0.016\" (0.40mm)", Image=//media.digikey.com/Photos/Panasonic%20Photos/ERJ-PA2-Series.jpg, Minimum Quantity=1, Number of Terminations=2, Packaging="Cut Tape (CT)", Part Number=ERJ-2RKF3602X, Part Status=Active, Quantity Available=208341, Series=ERJ, Size / Dimension="0.039\" L x 0.020\" W (1.00mm x 0.50mm)", Unit Price (USD)=0.00496
U1: "LT8650S - Dual Channel 4A, 42V, Synchronous Step-Down Silent Switcher 2 with 6.2µA Quiescent Current", Package="LQFN-32 Linear Technology", Digi-Key_Part_Number=LT8650SEV#PBF-ND, Digi-Key_Purchase_URL=https://www.digikey.com/product-detail/en/linear-technology-analog-devices/LT8650SEV-PBF/LT8650SEV-PBF-ND/7702365?utm_source=snapeda&utm_medium=aggregator&utm_campaign=symbol, MF="Linear Technology", MP=LT8650SEV#PBF, SnapEDA_Link=https://www.snapeda.com/parts/LT8650SEV%23PBF/Linear%20Technology/Analog%20Devices/view-part/?ref=snap
U2: "Mosfet Array 2 N-Channel (Dual) 30V 8.5A 3.1W Surface Mount 8-SO", ComponentLink1Description=Digikey, ComponentLink1URL=https://www.digikey.com/product-detail/en/vishay-siliconix/SI4214DDY-T1-GE3/SI4214DDY-T1-GE3CT-ND/3305376, ComponentLink2Description=Datasheet, ComponentLink2URL=http://www.vishay.com/docs/67907/si4214ddy-t1-e3.pdf, Digikey P/N=SI4214DDY-T1-GE3CT-ND, I_D (A)=8.5, Manufacturer_Part_Number=SI4214DDY-T1-GE3, Rds(on)=0.0195, RefDes=U, Type=DEV, V_DS=30V, Vendor=Vishay
U3: "Overvoltage, / Undervoltage and Reverse / Supply Protection Controller", Manufacturer_Part_Number=LTC4365CTS8#TRMPBF, Supplier Part Number 1=LTC4365CTS8#TRMPBFDKR-ND, RefDes=RefDes, Supplier 1=Digi-Key, Type=DEV, Vendor="Linear Technology"

## Via types
v1: diameter 27, hole 10, Component Side to Solder Side, 61 vias

## Nets (pads, with @x,y where several pads share a name; then routed paths per layer and width w, separated by ;. In a path a pad name is that pad's centre, name@x,y a point inside that pad or via, vN(x,y) a via of type N, cw(c..) or ccw(c..) an arc to the next point about the centre after c; other vN are vias at no path point)
3V3_EN_N: P2.2 R3.1 R7.2 TP6.1 U1.12 | length 355.8
  Component Side w10: P2.2@602.48,321.47 677.48,396.47 753.26,396.47 TP6.1 ; R3.1 R7.2 818.54,495.53 U1.12
5V_EN_N: P1.2 R2.1 R4.2 TP2.1 U1.11 | length 419.6
  Component Side w10: P1.2 677.48,231.47 753.26,231.47 TP2.1 ; R4.2 R2.1 734.48,511.47 795.1,511.47 798.85,515.22 U1.11
GND: C1.2 C2.2 C3.2 C4.2 C5.2 C8.2 C9.2 C10.2 C11.2 C14.2 C15.2 C16.2 C17.2 C20.1 C21.1 C22.2 C23.2 C24.2 C25.2 C26.2 FET1.3 FET2.3 LED4.2 LED5.2 P1.3 P2.3 P3.3 R1.1 R4.1 R7.1 R8.1 R9.1 R14.1 R15.1 R21.1 TP10.1 TP13.1 U1.2 U1.10 U1.33 U1.34 U1.35 U1.36 U1.37 U1.38 U3.4 | length 1601.8
  Component Side w8: R21.1 91.42,786.47 141.75,786.47 150,778.22 v1@150,757.85 ; R14.1 699.48,1030.77 v1@698.78,1031.47 ; C22.2 705.48,1086.47 697.48,1078.47 v1(697.48,1032.77) v1@698.78,1031.47 ; R9.1 v1@698.78,1031.47 ; v1(787.52,266.67) 787.64,266.78 FET1.3 853.08,155.6 TP13.1 ; R8.1 932.99,1049.18 C23.2 951.52,1105 v1(1007.48,1105) 1017.47,1105 1038,1084.47 1038,1050 1043.9,1044.1 C21.1 ; v1@989.58,266.67 FET2.3 ; C1.2 1024.43,922.47 1089.94,922.47 v1(1112.48,945)
  Component Side w10: LED4.2@-13.04,484.59 LED4.2@-12.52,484.08 ; v1@107.02,484.08 v1@107.48,484.53 ; C24.2@257.53,484.53 C24.2@262.48,479.59 ; v1@264.48,987.1 U3.4 ; C2.2 571.17,500.16 v1(571.17,425) 643.48,425 654.71,436.23 R4.1
  Component Side w35: LED4.2@-12.52,484.08 LED5.2 v1@107.02,484.08 ; v1(172.48,484.53) C24.2@257.53,484.53 ; C24.2@267.48,484.53 C25.2@352.53,484.53 ; C25.2@357.48,484.53 C26.2@442.53,484.53
  other v1: 1577.48,221.76 1652.48,221.76 1727.48,221.76 1352.48,224.03 1427.48,224.03 1502.48,224.03 978.73,267.37 1577.48,283.52 1652.48,283.52 1727.48,283.52 1352.48,285.78 1427.48,285.78 1502.48,285.78 107.48,484.09 822.48,601.23 873.66,601.23 822.48,641.47 874.48,641.47 1377.48,640.84 1427.48,640.78 1477.48,640.84 823.11,688.28 873.11,688.28 823.11,723.28 873.11,723.28 150,754.33 257.48,985.97 1357.48,1022.28 1432.48,1022.28 1507.48,1022.28 1582.48,1022.28 1657.48,1022.28 1732.48,1022.28 1357.48,1084.03 1432.48,1084.03 1507.48,1084.03 1582.48,1084.03 1657.48,1084.03 1732.48,1084.03
LTC8650S_VCC: C1.1 R10.1 R11.1 TP1.1 U1.25 | length 473
  Component Side w10: U1.25 946.89,730.37 ; R11.1 1187.48,176.47 1187.48,203.35 1152.48,238.35 1152.48,311.47 1175.57,334.56 1187.48,334.56 R10.1
  Component Side w12: 946.89,730.37 962.74,746.22 962.74,765.27 992.48,795 C1.1 1059.46,896.47 TP1.1
NetC6_1: C6.1 U1.24 | length 76.4
  Component Side w10: U1.24 976.18,710.68 C6.1
NetC6_2: C6.2 L1.1 U1.22 U1.23
NetC7_1: C7.1 U1.18 | length 84.8
  Component Side w10: U1.18 955.86,592.57 C7.1
NetC7_2: C7.2 L2.2 U1.19 U1.20
NetC12_2: C12.2 R5.1 R8.2 U1.28 | length 263.3
  Component Side w8: R5.1 877.59,913.35 U1.28
  Component Side w10: R5.1 869.48,968.98 876.96,976.47 876.96,1028.98 R8.2@874.48,1031.47
NetC13_2: C13.2 R6.1 R9.2 U1.31 | length 265.7
  Component Side w8: R6.1 796.48,877.47 796.48,823.85 818.3,802.02 ; U1.31 818.54,802.02
  Component Side w10: R6.1 R6.1@801.48,916.47 ; R6.1@802.99,928.96 C13.2 802.99,1028.98 R9.2@805.48,1031.47 ; 818.3,802.02 818.54,802.02
NetC18_1: C18.1 R14.2 | length 50
  Component Side w10: C18.1 R14.2@654.48,976.47
NetC18_2: C18.2 C20.2 U1.32 | length 185
  Component Side w8: C20.2 776.3,801.47 783.41,801.47 U1.32@798.62,786.26
  Component Side w10: C18.2 700.48,877.3 C20.2
NetC19_1: C19.1 R15.2
NetC19_2: C19.2 C21.2 U1.27 | length 497.2
  Component Side w8: U1.27 897.28,826.27 912.48,841.47 v1(912.48,863.28) ; C19.2 C21.2 1095.43,1000 v1(1108.74,1000)
  Solder Side w8: v1(912.48,863.28) 912.48,887.48 992.48,887.48 1105,1000 v1(1108.74,1000)
NetC22_1: C22.1 U1.29 | length 352.9
  Component Side w8: C22.1 827.48,1086.47 837.48,1076.47 837.48,895.73 857.91,875.3 U1.29
NetC23_1: C23.1 U1.30 | length 423.8
  Component Side w8: v1(827.48,839.13) 827.48,831.78 827.32,831.63 838.22,820.72 U1.30 ; v1(832.48,1131.47) 832.48,1125.96 C23.1
  Solder Side w8: v1(827.48,839.13) 827.48,1126.47 v1(832.48,1131.47)
NetCLD1_1: CLD1.1 CLD2.1 R19.1 | length 178.9
  Component Side w10: CLD2.1 -30.52,751.64 R19.1 -30.52,872.53 CLD1.1
NetCLD1_2: CLD1.2 LED3.1 | length 88.8
  Component Side w10: LED3.1 -20.95,1071.94 -20.95,1013.64 CLD1.2
NetCLD2_2: CLD2.2 LED4.1 | length 70.4
  Component Side w35: LED4.1@-22.52,545.1 CLD2.2@-22.52,615.53
NetCLD3_1: CLD3.1 R20.1 | length 95.4
  Component Side w12: CLD3.1@72.48,729.16 122.31,729.16 142.48,708.99 R20.1
NetCLD3_2: CLD3.2 LED5.1 | length 76.3
  Component Side w35: LED5.1 72.48,570.1 CLD3.2@72.48,611.05
NetD1_2: D1.2 R19.2 | length 109.8
  Component Side w10: R19.2 15.48,832.59 63.3,880.42 D1.2
NetFET1_1: FET1.1 R12.2 U1.14 | length 405
  Component Side w10: 857.91,485.52 U1.14 ; 858.22,485.52 858.22,485.21 887.91,455.52 887.91,418.65 853.08,383.82 FET1.1 892.48,302.19 892.48,239.57 882.48,229.57 R12.2
NetFET1_2: FET1.2 LED1.2 | length 145.3
  Component Side w8: FET1.2 931.82,234.39 959.31,206.9 LED1.2@959.31,174.72
  Component Side w10: LED1.2@959.31,174.72 LED1.2
NetFET2_1: FET2.1 R13.2 U1.15 | length 482.2
  Component Side w10: 877.59,504.89 U1.15 ; 877.91,504.89 877.91,494.12 907.91,464.12 907.91,421.04 987.48,341.47 FET2.1 1072.48,306.47 1070.19,304.19 1070.19,244.7 1037.48,211.99 R13.2
NetFET2_2: FET2.2 LED2.2 | length 133.6
  Component Side w10: LED2.2 1116.22,175.72 FET2.2
NetLED1_1: LED1.1 R10.2 R12.1 | length 638.1
  Component Side w10: R12.1 915.42,110.52 LED1.1 1021.42,110.52 1075.48,56.47 1242.62,56.47 1252.48,66.32 1252.48,221.47 1209.39,264.56 R10.2
NetLED2_1: LED2.1 R11.2 R13.1 | length 179.5
  Component Side w10: R13.1 1069.99,110.96 LED2.1 1182.99,110.96 R11.2
NetLED3_2: LED3.2 U3.6 | length 572.3
  Component Side w10: LED3.2 27.99,1096.48 v1(199.67,1096.48) ; v1(269.67,858.42) 322.88,858.42 329.68,865.22 U3.6
  Solder Side w10: v1(199.67,1096.48) 197.48,1094.28 197.48,888.62 227.67,858.42 v1(269.67,858.42)
NetP3_1: P3.1 R18.1 | length 779.3
  Component Side w10: v1(160,841.47) 162.48,843.94 R18.1
  Solder Side w10: v1(160,841.47) 65,746.47 65,435.7 171.96,328.73 271.27,328.73 P3.1@295,305
NetP3_2: P3.2 U3.5 | length 1940.8
  Component Side w10: P3.2@295,205 P3.2 87.5,436.23 -35.54,436.23 -82.52,483.22 -82.52,1104.59 -53.89,1133.22 357.48,1133.22 422.48,1068.22 422.48,968.22 403.48,949.22 351.15,949.22 335.03,933.1 304.09,933.1 U3.5
NetR1_2: R1.2 U1.1 | length 121.9
  Component Side w10: R1.2 737.48,790.3 737.48,759.1 746.52,750.05 U1.1
NetR16_1: R16.1 R17.2 U3.2 | length 299.4
  Component Side w10: R17.2 210.48,939.59 R16.1 210.48,1031.22 222.48,1043.22 347.48,1043.22 355.27,1035.43 U3.2 U3.2@352.68,989.69
NetR17_1: R17.1 R21.2 U3.3 | length 337.9
  Component Side w10: R21.2 178.87,814.59 212.48,848.2 R17.1 270.99,950.1 327.99,950.1 329.68,951.79 U3.3
NetTP3_1: TP3.1 U1.17 | length 219
  Component Side w10: U1.17 951.1,572.89 960.74,563.24 960.74,532.64 961.12,532.26 961.12,518.49 992.48,487.13 992.48,441.07 TP3.1
NetTP4_1: TP4.1 U1.13 | length 119
  Component Side w10: U1.13 838.22,456.15 TP4.1
NetTP5_1: TP5.1 U1.16 | length 106.3
  Component Side w10: U1.16@897.59,536.47 897.59,519.99 TP5.1
NetU2_1: U2.1 U2.3 | length 156.6
  Component Side w10: U2.3 262.48,689.59 282.48,709.59 282.48,764.59 257.48,789.59 U2.1
NetU2_2: U2.2 U2.4 U3.8 | length 482.4
  Component Side w10: U2.4 221.86,639.59 192.48,668.97 192.48,709.59 U2.2@222.48,739.59 ; U2.2 U2.2@222.48,739.59 ; U3.8 380.86,858.42 352.03,829.59 221.75,829.59 197.48,805.32 197.48,764.59 U2.2@222.48,739.59
POS3V3: C13.1 C14.1 C15.1 C16.1 C17.1 L2.1 R6.2 TP8.1 | length 119.6
  Component Side w10: C13.1 741.96,929.98 R6.2 757.48,914.47 v1(757.48,863.28)
POS5V: C8.1 C9.1 C10.1 C11.1 C12.1 L1.2 R5.2 TP7.1 U1.26 | length 823.5
  Component Side w10: U1.26 931.5,750.05 939.68,758.23 939.68,897.26 R5.2 915.48,958.96 C12.1 970,1013.48 v1(970,1035) ; v1(1190,915) 1237.48,867.52 L1.2
  Solder Side w10: v1(970,1035) 1140,1035 1190,985 v1(1190,915)
POSVBATT_PROT: C2.1 C3.1 C4.1 C5.1 C24.1 C25.1 C26.1 R2.2 R3.2 R20.2 TP11.1 U1.4 U1.5 U1.7 U1.8 U2.5 U2.6 U3.7 | length 329.1
  Component Side w8: U3.7 355.27,924 364.49,933.22 412.48,933.22 447.48,898.22 TP11.1
  Component Side w12: R20.2 142.48,583.07 160.95,564.59 C24.1
POSVBATT_RAW: D1.1 R16.2 R18.2 TP9.1 U2.7 U2.8 U3.1 | length 487.1
  Component Side w10: D1.1 159.36,994.59 R16.2 ; R18.2 162.48,987.47 R16.2 ; U3.1 380.86,1049.83 370.48,1060.22 TP9.1 R16.2
  other v1: 322.68,672.66 382.68,672.66 322.68,733.6 385.48,733.6 322.68,791.1 385.48,791.1
pads on no net: J1.1 J1.2 J1.3 J1.4 J1.5 J1.6 J1.7 J1.8 J1.9 J1.10 J1.11 J1.12 J1.13 J1.14 J1.15 J1.16 J1.17 J1.18 J1.19 J1.20 J1.21 J1.22 J1.23 J1.24 J1.25 J1.26 J1.27 J1.28 J1.29 J1.30 J1.31 J1.32 J1.33 J1.34 J1.35 J1.36 J1.37 J1.38 J1.39 J1.40 J1.41 J1.42 J2.1 J2.2 J2.3 J2.4 J2.5 J2.6 J2.7 J2.8 J2.9 J2.10 J2.11 J2.12 J2.13 J2.14 J2.15 J2.16 J2.17 J2.18 J2.19 J2.20 J2.21 J2.22 J2.23 J2.24 J2.25 J2.26 J2.27 J2.28 J2.29 J2.30 J2.31 J2.32 J2.33 J2.34 J2.35 J2.36 J2.37 J2.38 J2.39 J2.40 J2.41 J2.42 MH1.2 MH2.2 MH3.2 MH.2 P1.1 P2.1 U1.P1 U1.P2 U1.P3 U1.P4

## Polygon pours and split planes (outlines as drawn)
GND on Ground Plane (split plane): 2279.9,-189.9 -704.9,-189.9 -704.9,1669.9 2279.9,1669.9
no net on Power Plane (split plane): 2279.9,-189.9 -704.9,-189.9 -704.9,1669.9 2279.9,1669.9

## Other copper
Component Side:
  region net GND: 1341.01,400 1317.48,376.47 1317.48,156.47 1775,156.47 1775,316.47 1645,316.47 1561.47,400
  region net GND: 1340,875 1317.48,897.52 1317.48,1140 1775,1140 1775,980 1645,980 1540,875
  region: 487.48,783.22
  region net POSVBATT_RAW: 472.48,728.97 409.98,728.97 402.48,721.47 402.48,656.47 304.35,656.47 304.09,656.21 302.48,657.83 302.48,808.22 410.72,808.22 417.48,801.47 472.48,801.47
  region net POSVBATT_PROT: 227.48,543.22 472.48,543.22 513.11,583.85 624.86,583.85 647.48,606.47 787.48,606.47 787.64,698.22 776.89,708.97 634.98,708.97 634.98,713.11 614.87,733.22 527.48,733.22 527.48,726.59 502.48,701.59 417.48,701.59 417.48,628.22 397.48,608.22 397.48,588.22 227.48,588.22
  region: 724.86,703.22
  region net GND: 1358.73,686.47 1358.73,587.18 1513.18,587.18 1538.26,612.26 1587.48,612.26 1587.48,665.96 1536.74,665.96 1516.23,686.47
  region net POS5V: 1196.23,651.47 1196.23,851.47 1316.23,851.47 1341.23,826.47 1516.23,826.47 1516.23,764.1 1496.23,744.1 1496.23,708.97 1358.73,708.97 1301.23,651.47
  region net POS3V3: 1197.48,621.47 1197.48,421.47 1317.48,421.47 1342.48,446.47 1517.48,446.47 1517.48,508.84 1497.48,528.84 1497.48,563.97 1359.98,563.97 1302.48,621.47
  region net NetC6_2: 908.4,696.47 908.4,665.96 956.37,665.96 975.86,646.47 1137.48,646.47 1137.48,851.47 1057.48,851.47 1057.48,711.47 1042.48,696.47
  region: 1007.48,516.47
  region net NetC7_2: 908.4,640.78 908.4,605.78 963.16,605.78 971.79,597.16 1006.79,597.16 1033.4,570.54 1033.4,440.78 1053.4,420.78 1133.4,420.78 1133.4,625.78 1088.4,625.78 1047.81,625.93 1008.4,635.78 960.23,635.78 955.23,640.78
  region net GND: 894.9,750.05 894.9,572.89 791.51,572.89 785.09,566.47 750.09,566.47 705.09,521.47 630.35,521.47 605.09,496.21 605.09,476.47 525.09,476.47 525.09,536.47 605.09,536.47 655.85,591.47 792.48,591.47 798.85,597.85 798.85,707.71 784.86,721.7 664.86,721.7 605.09,781.47 525.09,781.47 525.09,841.47 605.09,841.47 620.09,826.47 620.09,811.47 645.09,786.47 706.86,786.47 722.36,756.59 739.28,739.58 794.93,739.49 802.78,750.05
  region net POSVBATT_PROT: 607.48,728.97

## Silkscreen, mask and mechanical layers (free items; w line width, h text height)
Top Overlay:
  drawing of 10 lines, arcs and shapes, not listed
  text "VBATT FAULT" at -100,1140 h40
  text "IN" at -40,410 h40
  text "OUT" at 15,410 h40
  text "VBATT GOOD" at -70,380 h40 r90
  text "3V3" at 367.48,311.47 h40
  text "DISABLE" at 447.48,226.47 h40
  text "ENABLE" at 622.48,226.47 h40
  text "5V" at 377.48,146.47 h40
  text "DISABLE" at 452.48,58.25 h40
  text "ENABLE" at 627.48,58.25 h40
  text "5V" at 940,50 h40
  text "3V3" at 1085,50 h40
  text "PGOOD" at 971.21,18.25 h40
  text "Power REV A" at -660,-90 h40
  text "Pod IV" at 1945,-100 h40
  text "VBATT+ IN, 5V and 3V3 OUT" at -660,-140 h40

## Dimensions
0,0 to -725,1690 on Drill Drawing
0,0 to -725,-210 on Drill Drawing
0,0 to 2300,-210 on Drill Drawing
0,0 to -725,-210 on Drill Drawing

## Text inside footprints (layer, text, board x,y; h text height)
J1: Top Overlay "40" at -564.37,1150.79 h59.06 r90; Top Overlay "22" at -564.37,250.79 h59.06 r90; Top Overlay "1" at -168.11,240.16 h59.06 r90; Top Overlay "19" at -168.11,1105.71 h59.06 r90
J2: Top Overlay "40" at 2139.37,299.21 h59.06 r270; Top Overlay "22" at 2139.37,1199.21 h59.06 r270; Top Overlay "1" at 1743.11,1209.84 h59.06 r270; Top Overlay "19" at 1743.11,344.29 h59.06 r270
U2: Mechanical 13 "*" at 266.48,759.59 h50
U3: Mechanical 13 "*" at 347.48,982.1 h50 r270